# EAGLE board CT_schematic (EAGLE 7.6.0)

Size 100 x 80 mm. Coordinates in mm from the lower left corner, seen from the top.
Outline: 0,0 100,0 100,80 0,80 0,0
Copper layers (1*16): Top 0.035mm / dielectric 1.5mm / Bottom 0.035mm
Design rules "default": minimum track width 10mil, minimum drill 24mil, track to track 8mil, track to pad 8mil, pad to pad 8mil, via to via 8mil, smd to smd 8mil, copper to edge 40mil, drill to drill 8mil, minimum pad ring 10mil, minimum via ring 8mil, stop-mask expansion 4mil, vias tented up to drill 0mil, thermal gap 10mil

## Footprints (pad centres in the part's own frame; a part is rotated, then mirrored left to right if it is on the bottom)
C0603 = smd 0.8 x 0.8: 1 -0.762,0; 2 0.762,0
C0402 = smd 0.5 x 0.5: 1 -0.508,0; 2 0.508,0
C1210 = smd 1.2 x 2.5: 1 -1.524,0; 2 1.524,0
C0805 = smd 1.2 x 1.3: 1 -1.016,0; 2 1.016,0
EXV-9B = smd 2.718 x 1.778: 1 -2.108,0; 2 2.108,0
EXV-9H = smd 3.505 x 1.676: 1 -2.857,0; 2 2.857,0
L0603 = smd 0.8 x 0.8: 1 -0.762,0; 2 0.762,0
PJ-037B_PACKAGE = drill 3.7 square: 1 12,0 | drill 3.2 square: 2 6,0
R0603 = smd 0.8 x 0.8: 1 -0.762,0; 2 0.762,0
LQFP144 = smd 0.35 x 1.35: 1 -8.75,-10.625; 2 -8.25,-10.625; 3 -7.75,-10.625; 4 -7.25,-10.625; 5 -6.75,-10.625; 6 -6.25,-10.625; 7 -5.75,-10.625; 8 -5.25,-10.625; 9 -4.75,-10.625; 10 -4.25,-10.625; 11 -3.75,-10.625; 12 -3.25,-10.625; 13 -2.75,-10.62; 14 -2.25,-10.625; 15 -1.75,-10.625; 16 -1.25,-10.625; 17 -0.75,-10.625; 18 -0.25,-10.625; 19 0.25,-10.625; 20 0.75,-10.625; 21 1.25,-10.625; 22 1.75,-10.625; 23 2.25,-10.625; 24 2.75,-10.62; 25 3.25,-10.625; 26 3.75,-10.625; 27 4.25,-10.625; 28 4.75,-10.625; 29 5.25,-10.625; 30 5.75,-10.625; 31 6.25,-10.625; 32 6.75,-10.625; 33 7.25,-10.625; 34 7.75,-10.625; 35 8.25,-10.625; 36 8.75,-10.625; 73 8.75,10.625; 74 8.25,10.625; 75 7.75,10.625; 76 7.25,10.625; 77 6.75,10.625; 78 6.25,10.625; 79 5.75,10.625; 80 5.25,10.625; 81 4.75,10.625; 82 4.25,10.625; 83 3.75,10.625; 84 3.25,10.625; 85 2.75,10.625; 86 2.25,10.625; 87 1.75,10.625; 88 1.25,10.625; 89 0.75,10.625; 90 0.25,10.625; 91 -0.25,10.625; 92 -0.75,10.625; 93 -1.25,10.625; 94 -1.75,10.625; 95 -2.25,10.625; 96 -2.75,10.625; 97 -3.25,10.625; 98 -3.75,10.625; 99 -4.25,10.625; 100 -4.75,10.625; 101 -5.25,10.625; 102 -5.75,10.625; 103 -6.25,10.625; 104 -6.75,10.625; 105 -7.25,10.625; 106 -7.75,10.625; 107 -8.25,10.625; 108 -8.75,10.625 | smd 1.35 x 0.35: 37 10.625,-8.75; 38 10.625,-8.25; 39 10.625,-7.75; 40 10.625,-7.25; 41 10.625,-6.75; 42 10.625,-6.25; 43 10.625,-5.75; 44 10.625,-5.25; 45 10.625,-4.75; 46 10.625,-4.25; 47 10.625,-3.75; 48 10.625,-3.25; 49 10.625,-2.75; 50 10.625,-2.25; 51 10.625,-1.75; 52 10.625,-1.25; 53 10.625,-0.75; 54 10.625,-0.25; 55 10.625,0.25; 56 10.625,0.75; 57 10.625,1.25; 58 10.625,1.75; 59 10.625,2.25; 60 10.625,2.75; 61 10.625,3.25; 62 10.625,3.75; 63 10.625,4.25; 64 10.625,4.75; 65 10.625,5.25; 66 10.625,5.75; 67 10.625,6.25; 68 10.625,6.75; 69 10.625,7.25; 70 10.625,7.75; 71 10.625,8.25; 72 10.625,8.75; 109 -10.625,8.75; 110 -10.625,8.25; 111 -10.625,7.75; 112 -10.625,7.25; 113 -10.625,6.75; 114 -10.625,6.25; 115 -10.625,5.75; 116 -10.625,5.25; 117 -10.625,4.75; 118 -10.625,4.25; 119 -10.625,3.75; 120 -10.625,3.25; 121 -10.625,2.75; 122 -10.625,2.25; 123 -10.625,1.75; 124 -10.625,1.25; 125 -10.625,0.75; 126 -10.625,0.25; 127 -10.625,-0.25; 128 -10.625,-0.75; 129 -10.625,-1.25; 130 -10.625,-1.75; 131 -10.625,-2.25; 132 -10.625,-2.75; 133 -10.625,-3.25; 134 -10.625,-3.75; 135 -10.625,-4.25; 136 -10.625,-4.75; 137 -10.625,-5.25; 138 -10.625,-5.75; 139 -10.625,-6.25; 140 -10.625,-6.75; 141 -10.625,-7.25; 142 -10.625,-7.75; 143 -10.625,-8.25; 144 -10.625,-8.75
SOIC-8 = smd 1.6 x 0.6: 1 -2.7,1.905 | smd 1.55 x 0.6: 2 -2.7,0.635; 3 -2.7,-0.635; 4 -2.7,-1.905; 5 2.7,-1.905; 6 2.7,-0.635; 7 2.7,0.635; 8 2.7,1.905
SAMTEC_FTSH-105-01-L-DV-K = smd 0.762 x 2.794: 1 -2.54,-2.032; 2 -2.54,2.032; 3 -1.27,-2.032; 4 -1.27,2.032; 5 0,-2.032; 6 0,2.032; 7 1.27,-2.032; 8 1.27,2.032; 9 2.54,-2.032; 10 2.54,2.032
QFN-28 = smd 0.813 x 0.305: 1 -2.451,1.5; 2 -2.451,1; 3 -2.451,0.5; 4 -2.451,0; 5 -2.451,-0.5; 6 -2.451,-1; 7 -2.451,-1.5; 15 2.451,-1.5; 16 2.451,-1; 17 2.451,-0.5; 18 2.451,0; 19 2.451,0.5; 20 2.451,1; 21 2.451,1.5 | smd 0.305 x 0.813: 8 -1.5,-2.451; 9 -1,-2.451; 10 -0.5,-2.451; 11 0,-2.451; 12 0.5,-2.451; 13 1,-2.451; 14 1.5,-2.451; 22 1.5,2.451; 23 1,2.451; 24 0.5,2.451; 25 0,2.451; 26 -0.5,2.451; 27 -1,2.451; 28 -1.5,2.451 | smd 3.607 x 3.607: 29 0,0
SJ-43515TS-SMT-TR = smd 2.2 x 3: 1 0.6,-7.4; 4 3.4,-7.4 | smd 3 x 3: 2 12.8,-7.4; 5 17,-3 | smd 2 x 3: 3 5.3,0; 6 2.5,0 | drill 1.8: P$7 4.5,-3.69; P$8 11.54,-3.69
ABS07-32.768KHZ-7-T = smd 1.1 x 2.4: 1 -2.5,0; 2 0,0
ASFL1 = smd 1.7 x 1.5: 1 -1.27,-1.1; 2 1.27,-1.1; 3 1.27,1.1; 4 -1.27,1.1
LP2954 = smd 1.6 x 0.6: 1 -2.475,1.905 | smd 1.55 x 0.6: 2 -2.475,0.635; 3 -2.475,-0.635; 4 -2.475,-1.905; 5 2.475,-1.905; 6 2.475,-0.635; 7 2.475,0.635; 8 2.475,1.905
SON-6 = smd 0.55 x 0.3: 1 -0.355,0.5 | smd 0.52 x 0.3: 2 -0.37,0; 3 -0.37,-0.5; 4 0.37,-0.5; 5 0.37,0; 6 0.37,0.5
SW_4-1437565-2 = smd 1.4 x 2.1: 1 -2.23,4.55; 2 -2.23,-4.55; 3 2.23,4.55; 4 2.23,-4.55
LGM67K-G1J2-24-Z = smd 0.8 x 1.4: A -2,0; C 0,0
NC7SZ125M5X = smd 1.3 x 0.7: 1 -1.3,0.95; 2 -1.3,0; 3 -1.3,-0.95; 4 1.3,-0.95; 5 1.3,0.95

## Placement (x,y rotation side)
C1  1e-07  [C0603]  -22.86,82.55 0 top  (outside the outline)
C2  1e-07  [C0603]  -26.67,82.55 0 top  (outside the outline)
C3  1e-07  [C0603]  -30.48,82.55 0 top  (outside the outline)
C4  1e-07  [C0603]  -34.29,82.55 0 top  (outside the outline)
C5  1e-07  [C0603]  -38.1,82.55 0 top  (outside the outline)
C6  1e-07  [C0603]  -41.91,82.55 0 top  (outside the outline)
C7  1e-07  [C0603]  -45.72,82.55 0 top  (outside the outline)
C8  1e-07  [C0603]  -49.53,82.55 0 top  (outside the outline)
C9  1e-07  [C0603]  -53.34,82.55 0 top  (outside the outline)
C10  1e-07  [C0603]  -57.15,82.55 0 top  (outside the outline)
C11  1e-07  [C0603]  -60.96,82.55 0 top  (outside the outline)
C12  4.7e-06  [C0603]  -19.05,82.55 0 top  (outside the outline)
C13  1e-07  [C0603]  -64.77,82.55 0 top  (outside the outline)
C14  1e-08  [C0603]  -68.58,82.55 0 top  (outside the outline)
C15  1e-06  [C0603]  -72.39,82.55 0 top  (outside the outline)
C16  1e-11  [C0402]  -30.48,87.63 0 top  (outside the outline)
C17  1e-11  [C0402]  -34.29,87.63 0 top  (outside the outline)
C18  1e-08  [C0402]  -38.1,87.63 0 top  (outside the outline)
C19  1e-07  [C0402]  -41.91,87.63 0 top  (outside the outline)
C20  2.2e-05  [C1210]  -57.15,63.5 0 top  (outside the outline)
C21  2.2e-05  [C1210]  -63.5,63.5 0 top  (outside the outline)
C22  1e-09  [C0402]  -45.72,87.63 0 top  (outside the outline)
C23  1e-09  [C0402]  -49.53,87.63 0 top  (outside the outline)
C24  1e-07  [C0402]  -53.34,87.63 0 top  (outside the outline)
C25  1e-07  [C0402]  -57.15,87.63 0 top  (outside the outline)
C26  1e-07  [C0402]  -60.96,87.63 0 top  (outside the outline)
C27  1e-07  [C0402]  -64.77,87.63 0 top  (outside the outline)
C28  1e-07  [C0402]  -68.58,87.63 0 top  (outside the outline)
C29  1e-05  [C0805]  -36.83,71.12 0 top  (outside the outline)
C30  1e-05  [C0805]  -41.91,71.12 0 top  (outside the outline)
C31  1e-05  [C0805]  -46.99,71.12 0 top  (outside the outline)
C32  1e-05  [C0805]  -52.07,71.12 0 top  (outside the outline)
C33  1e-05  [C0805]  -57.15,71.12 0 top  (outside the outline)
C34  1e-08  [C0402]  -72.39,87.63 0 top  (outside the outline)
C35  1e-08  [C0402]  -76.2,87.63 0 top  (outside the outline)
C36  1e-06  [EXV-9B]  -71.12,63.5 0 top  (outside the outline)
C37  2.2e-06  [EXV-9B]  -16.51,71.12 0 top  (outside the outline)
C38  1e-07  [C0402]  -80.01,87.63 0 top  (outside the outline)
C39  0.0001  [EXV-9H]  -55.88,55.88 0 top  (outside the outline)
C40  0.0001  [EXV-9H]  -67.31,55.88 0 top  (outside the outline)
C41  1e-08  [C0402]  -15.24,92.71 0 top  (outside the outline)
C42  1e-08  [C0402]  -19.05,92.71 0 top  (outside the outline)
F1  240.0  [L0603]  -76.2,82.55 0 top  (outside the outline)
J1  PJ-037B  [PJ-037B_PACKAGE]  -27.94,44.45 0 top  (outside the outline)
R2  1000.0  [R0603]  -80.01,82.55 0 top  (outside the outline)
R4  4700.0  [R0603]  -15.24,87.63 0 top  (outside the outline)
R5  10000.0  [R0603]  -25.4,77.47 0 top  (outside the outline)
R6  10000.0  [R0603]  -30.48,77.47 0 top  (outside the outline)
R7  10000.0  [R0603]  -35.56,77.47 0 top  (outside the outline)
R8  10000.0  [R0603]  -40.64,77.47 0 top  (outside the outline)
R9  10000.0  [R0603]  -45.72,77.47 0 top  (outside the outline)
R10  10000.0  [R0603]  -50.8,77.47 0 top  (outside the outline)
R11  10000.0  [R0603]  -55.88,77.47 0 top  (outside the outline)
R12  5.0  [R0603]  -19.05,87.63 0 top  (outside the outline)
R13  47000.0  [R0603]  -60.96,77.47 0 top  (outside the outline)
R14  47000.0  [R0603]  -66.04,77.47 0 top  (outside the outline)
R15  47000.0  [R0603]  -71.12,77.47 0 top  (outside the outline)
R16  680.0  [R0603]  -22.86,87.63 0 top  (outside the outline)
R17  100000.0  [R0603]  -67.31,71.12 0 top  (outside the outline)
R18  100000.0  [R0603]  -72.39,71.12 0 top  (outside the outline)
R19  164658.62  [R0603]  -62.23,71.12 0 top  (outside the outline)
R20  100000.0  [R0603]  -77.47,71.12 0 top  (outside the outline)
R21  10000.0  [R0603]  -76.2,77.47 0 top  (outside the outline)
R22  10000.0  [R0603]  -15.24,82.55 0 top  (outside the outline)
R23  9100.0  [R0603]  -26.67,87.63 0 top  (outside the outline)
R24  680000.0  [R0603]  -15.24,77.47 0 top  (outside the outline)
R25  120000.0  [R0603]  -20.32,77.47 0 top  (outside the outline)
U1  STM32L152ZDT6  [LQFP144]  -24.13,11.43 0 top  (outside the outline)
U2  AT25512N-SH-T  [SOIC-8]  -74.93,43.18 0 top  (outside the outline)
U3  FTSH-105-01-L-DV-K  [SAMTEC_FTSH-105-01-L-DV-K]  -58.42,7.62 0 top  (outside the outline)
U4  WM8731CLSEFL  [QFN-28]  -49.53,63.5 0 top  (outside the outline)
U5  SJ-43515TS-SMT-TR  [SJ-43515TS-SMT-TR]  -39.37,33.02 0 top  (outside the outline)
U6  SJ-43515TS-SMT-TR  [SJ-43515TS-SMT-TR]  -67.31,33.02 0 top  (outside the outline)
U7  ABS07-32.768KHZ-7-T  [ABS07-32.768KHZ-7-T]  -27.94,64.77 0 top  (outside the outline)
U8  ASFL1-12.288MHZ-EC-T  [ASFL1]  -30.48,55.88 0 top  (outside the outline)
U9  ASFL1-25MHZ-NCS  [ASFL1]  -46.99,55.88 0 top  (outside the outline)
U10  LP2954AIMX/NOPB  [LP2954]  -60.96,43.18 0 top  (outside the outline)
U11  TPS3895ADRYR  [SON-6]  -21.59,91.44 0 top  (outside the outline)
U12  4-1437565-2  [SW_4-1437565-2]  -44.45,44.45 0 top  (outside the outline)
U13  Q65110A2395  [LGM67K-G1J2-24-Z]  -36.83,63.5 0 top  (outside the outline)
U14  nc7sz125m5x  [NC7SZ125M5X]  -24.13,71.12 0 top  (outside the outline)
U15  nc7sz125m5x  [NC7SZ125M5X]  -30.48,71.12 0 top  (outside the outline)

## Library data of the parts
C1-C42 F1 J1 R2 R4-R25 U1-U15 = circuit_tree

## Nets
CLK_CRYSTAL_U1_8: C16.1 U1.8 U7.1
CLK_CRYSTAL_U1_9: C17.1 U1.9 U7.2
CLK_U1_23: U1.23 U9.3
CLK_U4_1: U4.1 U8.3
GND: C1.2 C2.2 C3.2 C4.2 C5.2 C6.2 C7.2 C8.2 C9.2 C10.2 C11.2 C12.2 C13.2 C14.2 C15.2 C16.2 C17.2 C18.2 C19.2 C23.2 C24.2 C25.2 C26.2 C27.2 C28.2 C29.2 C30.2 C31.2 C32.2 C33.2 C34.2 C35.2 C36.2 C37.2 C38.2 C39.2 C40.2 C41.2 C42.2 J1.2 R2.2 R5.2 R12.2 R13.2 R14.2 R15.2 R20.2 R23.2 R25.2 U1.16 U1.30 U1.31 U1.38 U1.51 U1.61 U1.71 U1.83 U1.94 U1.107 U1.120 U1.130 U1.143 U2.4 U3.3 U3.5 U4.4 U4.15 U4.19 U4.25 U4.26 U4.29 U5.1 U6.1 U8.2 U9.2 U10.4 U11.2 U13.C U14.2 U14.3 U15.1 U15.3
NET_U1_6: C13.1 U1.6
NET_U1_25: R4.1 U1.25 U15.4
NET_U1_33: C14.1 C15.1 F1.1 U1.32 U1.33
NET_U1_138: R5.1 U1.138
NET_U1_141: U13.A
NET_U1_142: U12.3 U12.4
NET_U2_3: R6.1 U2.3
NET_U2_7: R8.1 U2.7
NET_U3_9: R12.1 U3.9
NET_U4_9: U4.9
NET_U4_20: C28.1 C33.1 U4.20
NET_U5_2: C21.1 R14.1 U5.2
NET_U5_5: C20.1 R13.1 U5.5
NET_U5_13: C20.2
NET_U5_14: C21.2
NET_U6_5: C22.1 C23.1 R15.1 R16.1 U6.5
NET_U6_21: R16.2
NET_U6_22: C22.2
NET_U10_3: R18.1 U10.3
NET_U10_5: R17.1 U10.5
NET_U10_7: R19.2 R20.1 U10.7
NET_U11_1: R22.1 R23.1 U11.1
NET_U11_3: R24.2 R25.1 U11.3
NET_U11_4: R21.1 U11.4 U14.4 U15.2
NET_U12_1: R2.1 U12.1 U12.2
PROC_I2S2_CK: U1.74 U4.7
PROC_I2S2_SD: U1.76 U4.8
PROC_I2S2_WS: U1.73 U4.9 U4.11
PROC_SPI1_MISO: U1.42 U2.2
PROC_SPI1_MOSI: U1.43 U2.5
PROC_SPI1_NSS: R7.1 U1.40 U2.1
PROC_SPI1_SCK: U1.41 U2.6
PROC_SYS_JTCK_SWCLK: R10.1 U1.109 U3.4
PROC_SYS_JTDO_TRACESWO: U1.133 U3.6
PROC_SYS_JTMS_SWDIO: R11.1 U1.105 U3.2
RST_OUT_U3_JTAG_RST_B: R9.1 U3.10 U14.1
VCC_S1_6V3: C36.1 C39.1 C40.1 J1.1 R18.2 U10.8
VCC_TIER1_3V3: C1.1 C2.1 C3.1 C4.1 C5.1 C6.1 C7.1 C8.1 C9.1 C10.1 C11.1 C12.1 C18.1 C19.1 C24.1 C25.1 C26.1 C27.1 C29.1 C30.1 C31.1 C32.1 C34.1 C35.1 C37.1 C38.1 C41.1 C42.1 F1.2 R4.2 R6.2 R7.2 R8.2 R9.2 R10.2 R11.2 R17.2 R19.1 R21.2 R22.2 R24.1 U1.17 U1.39 U1.52 U1.62 U1.72 U1.84 U1.95 U1.108 U1.121 U1.131 U1.144 U2.8 U3.1 U4.3 U4.5 U4.12 U4.18 U8.4 U9.4 U10.1 U11.6 U14.5 U15.5

## Tracks (layer width: path | path; a pad name or v marks a point on that pad's centre or on a via)
CLK_CRYSTAL_U1_8  (2 unrouted)
CLK_CRYSTAL_U1_9  (2 unrouted)
CLK_U1_23  (1 unrouted)
CLK_U4_1  (1 unrouted)
GND  (81 unrouted)
NET_U1_6  (1 unrouted)
NET_U1_25  (2 unrouted)
NET_U1_33  (4 unrouted)
NET_U1_138  (1 unrouted)
NET_U1_142  (1 unrouted)
NET_U2_3  (1 unrouted)
NET_U2_7  (1 unrouted)
NET_U3_9  (1 unrouted)
NET_U4_20  (2 unrouted)
NET_U5_2  (2 unrouted)
NET_U5_5  (2 unrouted)
NET_U6_5  (4 unrouted)
NET_U10_3  (1 unrouted)
NET_U10_5  (1 unrouted)
NET_U10_7  (2 unrouted)
NET_U11_1  (2 unrouted)
NET_U11_3  (2 unrouted)
NET_U11_4  (3 unrouted)
NET_U12_1  (2 unrouted)
PROC_I2S2_CK  (1 unrouted)
PROC_I2S2_SD  (1 unrouted)
PROC_I2S2_WS  (2 unrouted)
PROC_SPI1_MISO  (1 unrouted)
PROC_SPI1_MOSI  (1 unrouted)
PROC_SPI1_NSS  (2 unrouted)
PROC_SPI1_SCK  (1 unrouted)
PROC_SYS_JTCK_SWCLK  (2 unrouted)
PROC_SYS_JTDO_TRACESWO  (1 unrouted)
PROC_SYS_JTMS_SWDIO  (2 unrouted)
RST_OUT_U3_JTAG_RST_B  (2 unrouted)
VCC_S1_6V3  (5 unrouted)
VCC_TIER1_3V3  (63 unrouted)